# Altium PCB Lower Steer By Wire.PcbDoc
Units mm, origin at the board's own origin, x right, y up, seen from the top; angles counter-clockwise.
Board outline 70 x 50 mm, 2 copper layers (Top Layer, Bottom Layer); 10 components, 14 nets, 89 pads, 3 vias.
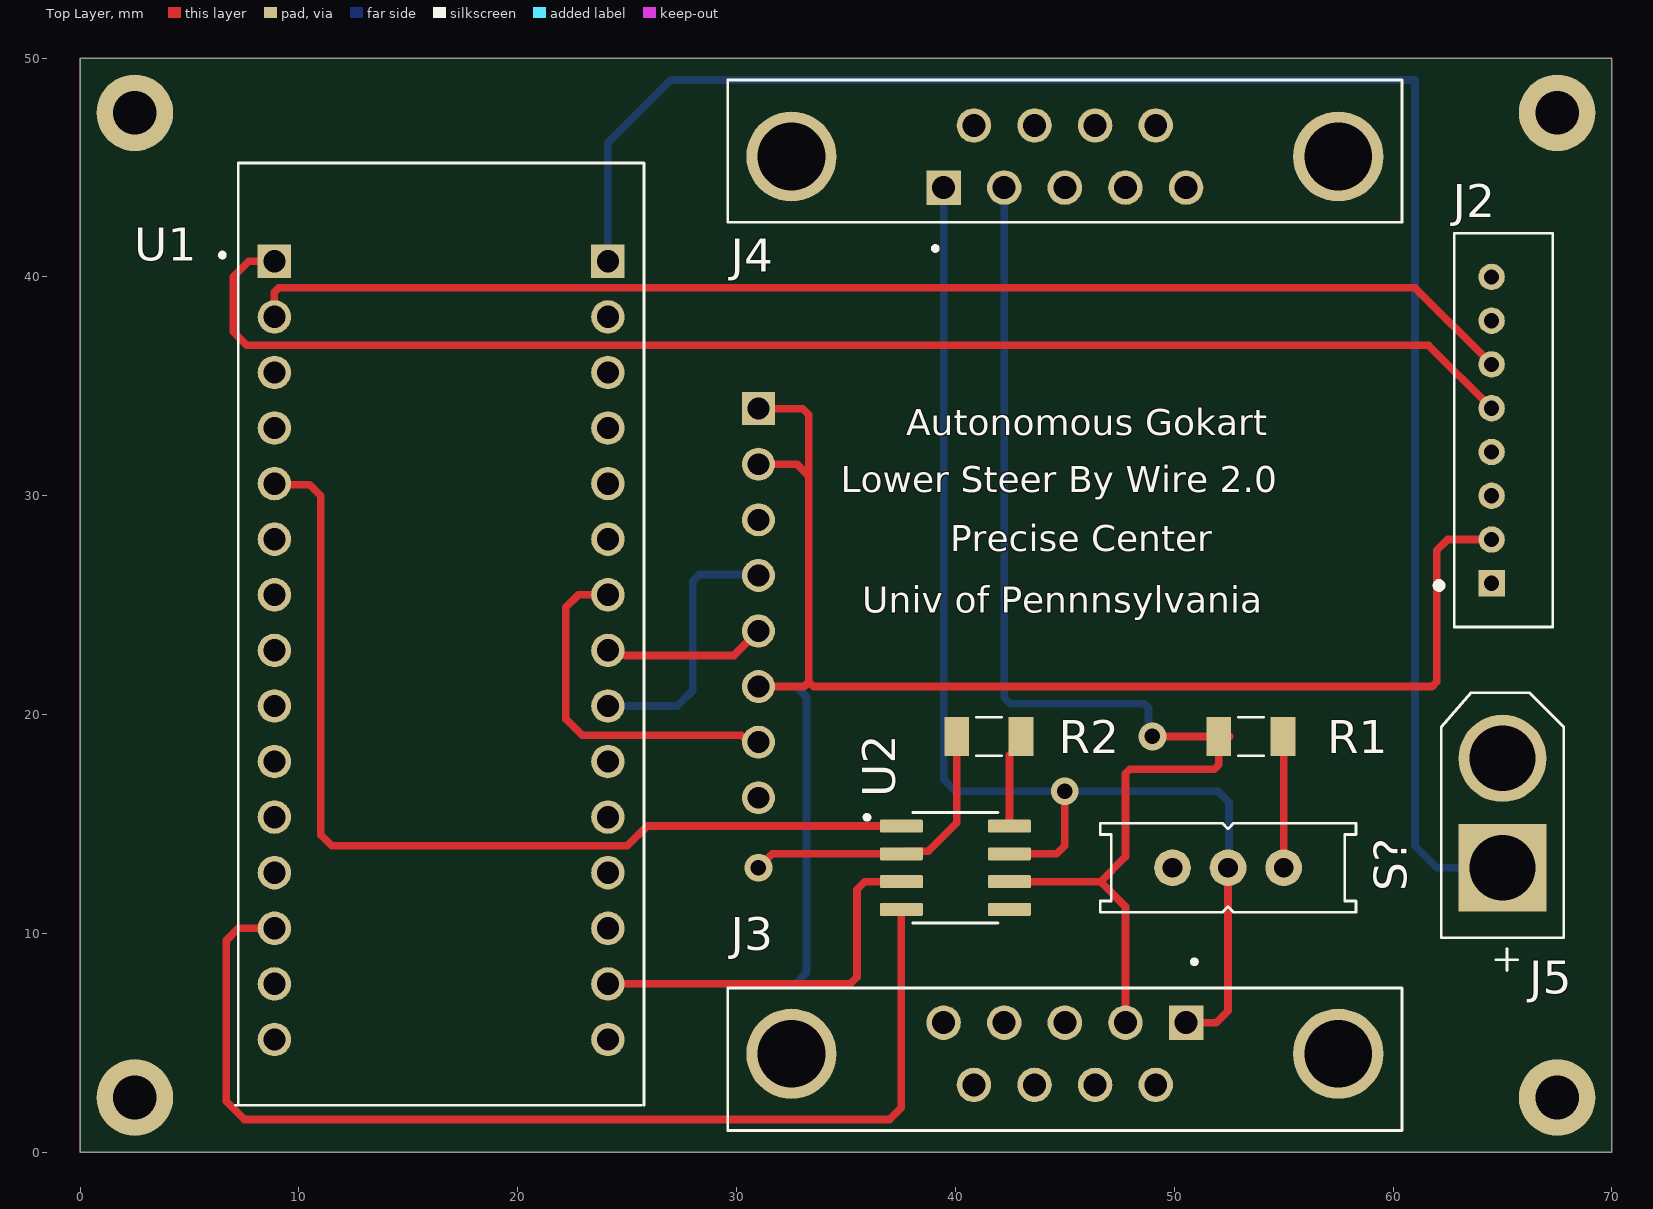
[diagram p0: Top Layer view]
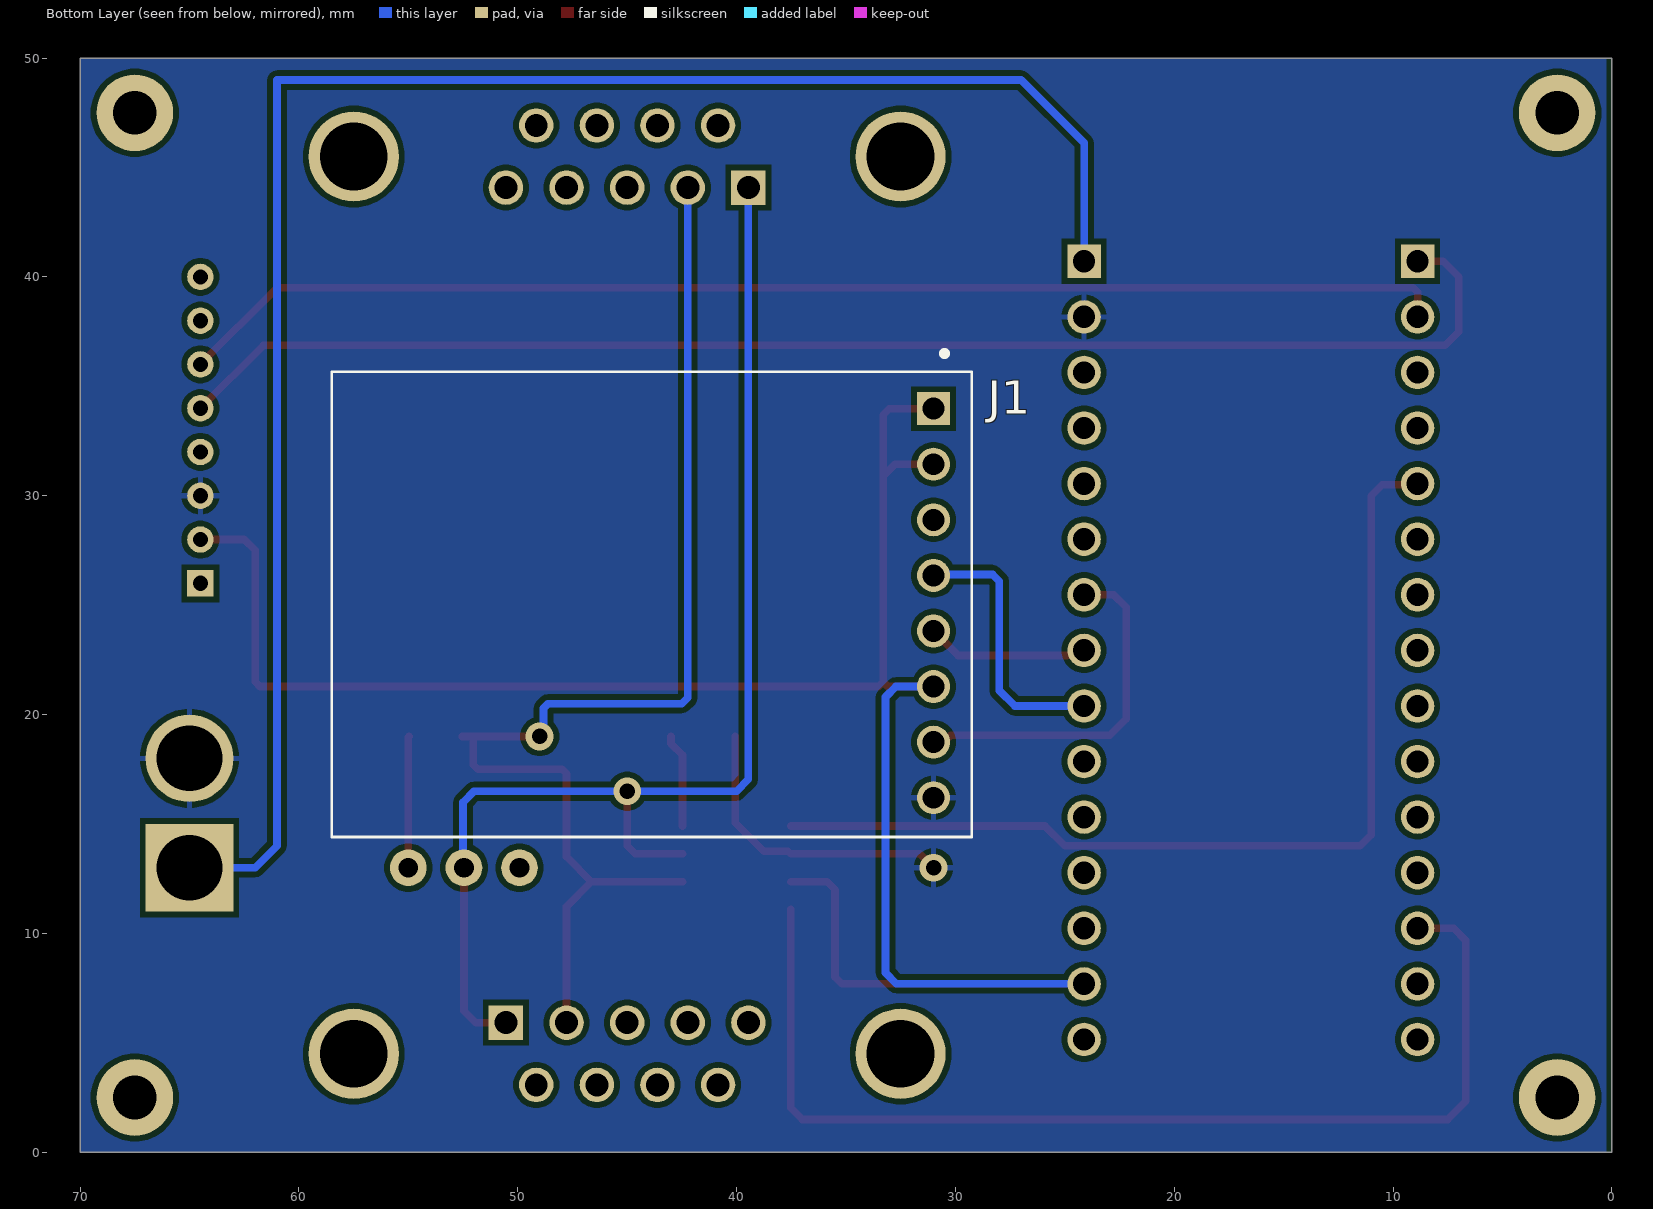
[diagram p1: Bottom Layer view, seen from below]

## Layer stack, top to bottom
Top Solder: solder mask 0.0102, Solder Resist, Dk 3.5
Top Layer: signal copper 0.0356
Dielectric 1: dielectric 0.32, FR-4, Dk 4.8
Bottom Layer: signal copper 0.0356
Bottom Solder: solder mask 0.0102, Solder Resist, Dk 3.5

## Board outline
0,0 0,50 70,50 70,0

## Design rules (kind name [scope] priority, off if disabled: settings)
Clearance [All] p1: gap=0.254 ignorepadtopadclearanceinfootprint=FALSE except(0: Arc-Hole Track-Hole SMDPad-Hole THPad-Hole Via-Hole Fill-Hole Poly-Hole Region-Hole Text-Hole)
HoleSize [All] p1: absolutevalues=TRUE maxlimit=5 minlimit=0.025 maxpercent=80.000 minpercent=20.000
PolygonConnect [All] p1: connectstyle=Relief reliefconductorwidth=0.254 reliefentries=4 polygonreliefangle="90 Angle" airgapwidth=0.254
RoutingVias [All] p1: holewidth=0.711 width=1.27 viastyle="Through Hole" minholewidth=0.711 minwidth=1.27 maxholewidth=0.711 maxwidth=1.27
SolderMaskExpansion [All] p1: expansion=0.102 istentingtop=FALSE
Width [All] p1: maxlimit=0.35 minlimit=0.254 preferedwidth=0.35 minimp=50.000000 maximp=50.000000 favimp=50.000000
29 further rules are at their usual default settings.

## Classes and differential pairs
component class Sheet1: J1 J2 J5 R1 R2 S? U1 U2

## Components (designator, comment, footprint, x,y, rotation, side; value= is the part's Value field where it differs from the comment)
J1 "826629-8" TE_826629-8 30.5,34.4 r270 bottom
J2 "B8B-PH-K-S(LF)(SN)" JST_B8B-PH-K-S(LF)(SN) 64.5,26 r90 top
J3 "A-DF_09_A_KG-T2S" ASSMANN_A-DF_09_A_KG-T2S 45,4.5 r0 top
J4 "A-DF_09_A_KG-T2S" ASSMANN_A-DF_09_A_KG-T2S 45,45.5 r180 top
J5 "XT30-M" AMASS_XT60-M 65,16.6 r90 top
R1 "120" RESC3216X65N 53.5,19 r180 top
R2 "10K" RESC3216X65N 41.53,19 r180 top
S? "EG1218" EG1218 52.46,13 r0 top
U1 "NUCLEO-L432KC" MODULE_NUCLEO-L432KC 16.5,24.5 r0 top
U2 "SN65HVD230QDR" SOIC127P599X175-8N 40,13 r0 top

## Footprints (in the part's own frame and the unit in brackets; to place one, negate y for a bottom-side part, rotate by r counter-clockwise, add the part's x,y. Pads: shape width x height; smd on the part's side, far side on the other; paste and mask are expansions set on the pad)
AMASS_XT60-M [mm]
  round 4 hole 3: N(1.4,0)
  rect 4x4 hole 3: P(-3.6,0)
  silkscreen extent -8.3,-2.8 4.4,2.8
ASSMANN_A-DF_09_A_KG-T2S [mm]
  rect 1.575x1.575 / inner round 1.575 / far side rect 1.575x1.575 hole 1.05: 1(5.54,1.42)
  round 1.575 hole 1.05: 2(2.77,1.42) 3(0,1.42) 4(-2.77,1.42) 5(-5.54,1.42) 6(4.155,-1.42) 7(1.385,-1.42) 8(-1.385,-1.42) 9(-4.155,-1.42)
  round 4.116 hole 3.1: S1(-12.495,0) S2(12.495,0)
  silkscreen extent -15.41,-3.5 15.41,4.3
EG1218 [mil]
  round 66 hole 35.43: O(-100,0) P(0,0) S(100,0)
  silkscreen extent -230,-80 230,80
JST_B8B-PH-K-S(LF)(SN) [mm]
  rect 1.208x1.208 hole 0.7: 1(0,0)
  round 1.208 hole 0.7: 2(2,0) 3(4,0) 4(6,0) 5(8,0) 6(10,0) 7(12,0) 8(14,0)
  silkscreen extent -2,-2.8 16,2.54
MODULE_NUCLEO-L432KC [mm]
  rect 1.53x1.53 hole 1.02: CN3_1(-7.62,16.215) CN4_1(7.62,16.215)
  round 1.53 hole 1.02: CN3_2(-7.62,13.675) CN3_3(-7.62,11.135) CN3_4(-7.62,8.595) CN3_5(-7.62,6.055) CN3_6(-7.62,3.515) CN3_7(-7.62,0.975) CN3_8(-7.62,-1.565) CN3_9(-7.62,-4.105) CN3_10(-7.62,-6.645) CN3_11(-7.62,-9.185) CN3_12(-7.62,-11.725) CN3_13(-7.62,-14.265) CN3_14(-7.62,-16.805) CN3_15(-7.62,-19.345) CN4_2(7.62,13.675) CN4_3(7.62,11.135) CN4_4(7.62,8.595) CN4_5(7.62,6.055) CN4_6(7.62,3.515) CN4_7(7.62,0.975) CN4_8(7.62,-1.565) CN4_9(7.62,-4.105) CN4_10(7.62,-6.645) CN4_11(7.62,-9.185) CN4_12(7.62,-11.725) CN4_13(7.62,-14.265) CN4_14(7.62,-16.805) CN4_15(7.62,-19.345)
  silkscreen extent -10.1,-22.35 9.27,20.7
RESC3216X65N [mm]
  rect 1.13x1.77 smd: 1(-1.47,0) 2(1.47,0)
  silkscreen extent -0.58,-0.88 0.58,0.88
SOIC127P599X175-8N [mm]
  rrect25% 1.97x0.6 smd: 1(-2.47,1.905) 2(-2.47,0.635) 3(-2.47,-0.635) 4(-2.47,-1.905) 5(2.47,-1.905) 6(2.47,-0.635) 7(2.47,0.635) 8(2.47,1.905)
  silkscreen extent -4.14,-2.52 1.95,2.52, body extent -3,-2.45 3,2.45, height 1.75
TE_826629-8 [mm]
  rect 1.508x1.508 hole 1: 1(0.42,-0.5)
  round 1.508 hole 1: 2(2.96,-0.5) 3(5.5,-0.5) 4(8.04,-0.5) 5(10.58,-0.5) 6(13.12,-0.5) 7(15.66,-0.5) 8(18.2,-0.5)
  silkscreen extent -2.2,-28 20,1.25

## Part data
J1: "Conn Unshrouded Header HDR 8 POS 2.54mm Solder ST Thru-Hole Automotive Box", Package=None, Availability=Unavailable, EU_RoHS_Compliance=Compliant, MF="TE Connectivity", MP=826629-8, Price=None, SnapEDA_Link=https://www.snapeda.com/parts/826629-8/TE%20Connectivity%20AMP%20Connectors/view-part/456641/?ref=snap, TE_purchase_URL=https://www.te.com/usa-en/product-826629-8.html?te_bu=Cor&te_type=disp&te_campaign=seda_glo_cor-seda-global-disp-prtnr-fy19-seda-model-bom-cta_sma-317_1&elqCampaignId=32493
J2: "Connector Header Through Hole 8 position 0.079 _2.00mm_", Package=None, MF="JST Sales", MP=B8B-PH-K-S_LF__SN_, SnapEDA_Link=https://www.snapeda.com/parts/B8B-PH-K-S%28LF%29%28SN%29/JST%20Sales%20America%20Inc./view-part/424392/?ref=snap
J3 J4: "9 Position D-Sub Receptacle, Female Sockets Connector", Package=None, Availability="In Stock", Check_prices=https://www.snapeda.com/parts/A-DF%2009%20A/KG-T2S/Assmann+WSW+Components/view-part/?ref=eda, MF="Assmann WSW", MP="A-DF 09 A/KG-T2S", Price=None, Purchase-URL="https://pricing.snapeda.com/search/part/A-DF 09 A/KG-T2S/?ref=eda", SnapEDA_Link=https://www.snapeda.com/parts/A-DF%2009%20A/KG-T2S/Assmann+WSW+Components/view-part/?ref=snap
J5: "Plug; DC supply; XT60; male; PIN: 2; for cable; soldered; 30A; 500V", Package=Package, Availability="Not in stock", Check_prices=https://www.snapeda.com/parts/XT60-M/AMASS/view-part/?ref=eda, MF=AMASS, MP=XT60-M, Price=None, SnapEDA_Link=https://www.snapeda.com/parts/XT60-M/AMASS/view-part/?ref=snap
R1 R2: library part KTR18EZPF9530, Package=None, Availability=Unavailable, MP=KTR18EZPF9530, Price=None
S?: "<b>SLIDING SWITCH</b><p> 0.1\" spacing through hole, vertical SPDT slide switch <p>http://www.ladyada.net/library/pcb/eaglelibrary.html</p>", Package=None, Availability=Unavailable, MP=EG1218, Price=None
U1: "STM32 Nucleo-32 development board with STM32L432KC MCU, supports Arduino connectivity", Package=None, Availability=Unavailable, MP=NUCLEO-L432KC, Price=None
U2: "3.3-V CAN Transceiver with Standby Mode 8-SOIC -40 to 125", Package="SOIC-8 Texas Instruments", Availability=Good, Check_prices=https://www.snapeda.com/parts/SN65HVD230QDR/Texas%20Instruments/view-part/1178075/?ref=eda, MF="Texas Instruments", MP=SN65HVD230QDR, Price=None, Purchase-URL=https://pricing.snapeda.com/search/part/SN65HVD230QDR/?ref=eda, SnapEDA_Link=https://www.snapeda.com/parts/SN65HVD230QDR/Texas%20Instruments/view-part/1178075/?ref=snap

## Free pads (board coordinates)
  round 3.5 hole 2: 1(2.5,47.5) 2(67.5,47.5) 3(2.5,2.5) 4(67.5,2.5)

## Via types
v1: diameter 1.27, hole 0.711, Top Layer to Bottom Layer, 3 vias

## Nets (pads, with @x,y where several pads share a name; then routed paths per layer and width w, separated by ;. In a path a pad name is that pad's centre, name@x,y a point inside that pad or via, vN(x,y) a via of type N, cw(c..) or ccw(c..) an arc to the next point about the centre after c; other vN are vias at no path point)
3.3V: J1.1 J1.2 J1.6 J2.2 U1.CN4_14 U2.3 | length 99.6
  Top Layer w0.35: U1.CN4_14 35.195,7.695 35.5,8 35.5,12 35.865,12.365 U2.3 ; J1.2 32.76,31.44 33.3,30.9 ; J1.1 33.02,33.98 33.3,33.7 33.3,30.9 ; J1.6@31.222,21.058 J1.6 33.08,21.28 33.3,21.5 ; J2.2 62.5,28 62,27.5 62,21.5 61.78,21.28 33.52,21.28 33.3,21.5 ; 33.3,21.5 33.3,30.9
  Bottom Layer w0.35: U1.CN4_14 32.695,7.695 33.195,8.195 33.195,20.805 32.72,21.28 J1.6 J1.6@30.88,21.4
5V: J5.P U1.CN4_1 | length 82.9
  Bottom Layer w0.35: U1.CN4_1 24.12,46.12 27,49 61,49 61,14 62,13 J5.P
CAN_HIGH: J3.1 J4.1 S?.P U2.7 | length 57.4
  Top Layer w0.35: U2.7 44.635,13.635 45,14 v1(45,16.5) ; J3.1 51.92,5.92 52.46,6.46 S?.P
  Bottom Layer w0.35: J4.1 39.46,17.04 40,16.5 v1(45,16.5) 52,16.5 52.5,16 52.5,13.04 S?.P
CAN_LOW: J3.2 J4.2 R1.2 U2.6 | length 57.2
  Top Layer w0.35: U2.6 46.635,12.365 ; J3.2 47.77,11.23 46.635,12.365 ; v1(49,19) R1.2 ; R1.2@52.53,19 R1.2 ; 46.635,12.365 47.77,13.5 47.77,17.295 47.975,17.5 51.825,17.5 52.03,17.705 R1.2
  Bottom Layer w0.35: J4.2 42.23,20.77 42.5,20.5 48.619,20.5 48.824,20.295 48.824,19.176 v1(49,19)
CAN_RX: U1.CN3_13 U2.4 | length 50.3
  Top Layer w0.35: U1.CN3_13 7.235,10.235 6.677,9.677 6.677,2.323 7.5,1.5 37,1.5 37.53,2.03 U2.4
CAN_TX: U1.CN3_5 U2.1 | length 45.2
  Top Layer w0.35: U1.CN3_5 U1.CN3_5@8.935,30.5 ; U1.CN3_5@9.106,30.329 U1.CN3_5@8.935,30.5 ; U2.1 25.905,14.905 25,14 11.5,14 11,14.5 11,30 10.5,30.5 U1.CN3_5@8.935,30.5
CLK: J1.5 U1.CN4_8 | length 7.4
  Top Layer w0.35: U1.CN4_8 24.346,22.709 24.906,22.709 24.915,22.7 29.88,22.7 J1.5
CSN: J1.4 U1.CN4_9 | length 12.3
  Bottom Layer w0.35: U1.CN4_9 27.295,20.395 28,21.1 28,26.1 28.3,26.4 30.96,26.4 J1.4
GND: J1.8 J2.3 J5.N R2.2 U1.CN4_2 U2.2 | length 13.9
  Top Layer w0.35: v1(31,13) 31.635,13.635 U2.2 37.655,13.76 38.76,13.76 40.06,15.06 R2.2
MISO: J1.7 U1.CN4_7 | length 16.5
  Top Layer w0.35: U1.CN4_7 22.775,25.475 22.2,24.9 22.2,19.8 22.951,19.049 30.216,19.049 30.303,18.962 30.778,18.962 J1.7
NetR1_1: R1.1 S?.S | length 6
  Top Layer w0.35: R1.1 55,18.97 S?.S
NetR2_1: R2.1 U2.8 | length 4.3
  Top Layer w0.35: U2.8 42.47,18.15 43,18.68 R2.1
VESC_RX: J2.5 U1.CN3_1 | length 63.6
  Top Layer w0.35: U1.CN3_1 7.715,40.715 7,40 7,37.5 7.616,36.884 61.616,36.884 J2.5
VESC_TX: J2.6 U1.CN3_2 | length 58.5
  Top Layer w0.35: U1.CN3_2 8.88,39.295 9.085,39.5 61,39.5 J2.6
  Bottom Layer w0.35: U1.CN3_2 U1.CN3_2@9.045,38.34
pads on no net: J1.3 J2.1 J2.4 J2.7 J2.8 J3.3 J3.4 J3.5 J3.6 J3.7 J3.8 J3.9 J3.S1 J3.S2 J4.3 J4.4 J4.5 J4.6 J4.7 J4.8 J4.9 J4.S1 J4.S2 S?.O U1.CN3_3 U1.CN3_4 U1.CN3_6 U1.CN3_7 U1.CN3_8 U1.CN3_9 U1.CN3_10 U1.CN3_11 U1.CN3_12 U1.CN3_14 U1.CN3_15 U1.CN4_3 U1.CN4_4 U1.CN4_5 U1.CN4_6 U1.CN4_10 U1.CN4_11 U1.CN4_12 U1.CN4_13 U1.CN4_15 U2.5

## Polygon pours and split planes (outlines as drawn)
GND on Bottom Layer "NONET_L02_P-001" (solid, pour order 0): 0,50 70,50 70,0 0,0

## Keep-outs
Keep-Out Layer:
  lines w0.001: 0,0 0,50

## Silkscreen, mask and mechanical layers (free items; w line width, h text height)
Top Overlay:
  text "Autonomous Gokart" at 37.754,32.754 h1.2
  text "Lower Steer By Wire 2.0" at 34.754,30.154 h1.2
  text "Precise Center" at 39.754,27.454 h1.2
  text "Univ of Pennnsylvania" at 35.754,24.654 h1.2
Mechanical 1:
  lines w0.001: 0,0 70,0 70,50 0,50 ; 0,0 0,50 ; 0,0 0,50 ; 0,0 0,50
  lines w0.254: 0,0 70,0 70,50 0,50 0,0